# Altium PCB PCB3.PcbDoc
Units mm, origin at the board's own origin, x right, y up, seen from the top; angles counter-clockwise.
Board outline 90 x 47 mm, 2 copper layers (Top Layer, Bottom Layer); 34 components, 53 nets, 140 pads, 265 vias.
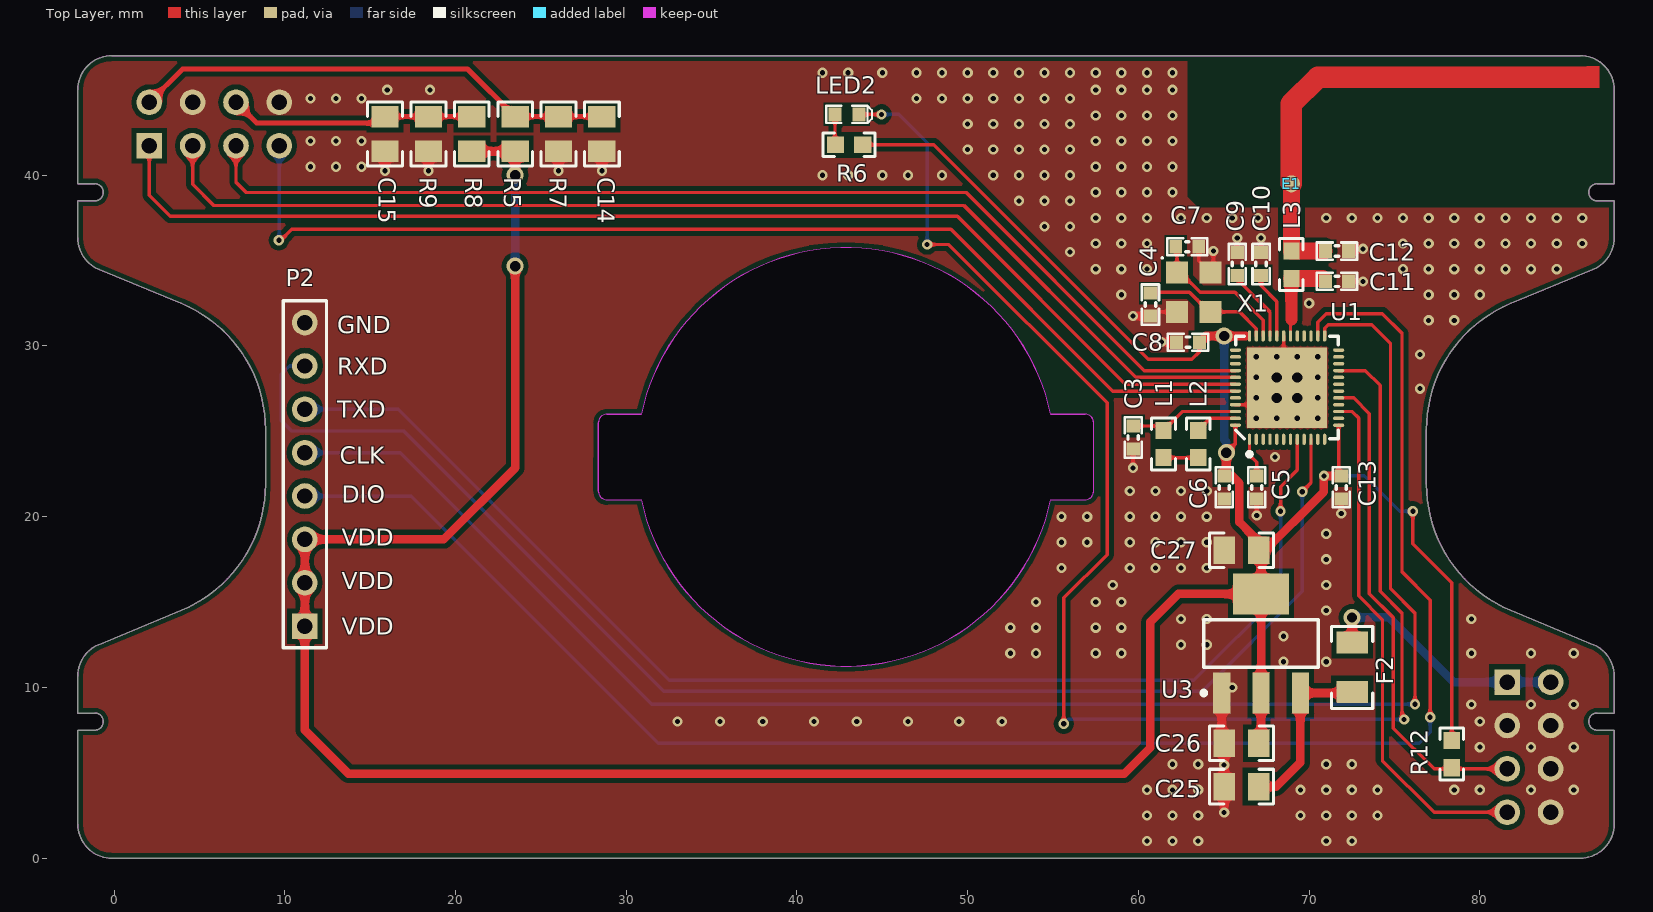
[diagram p0: Top Layer view]
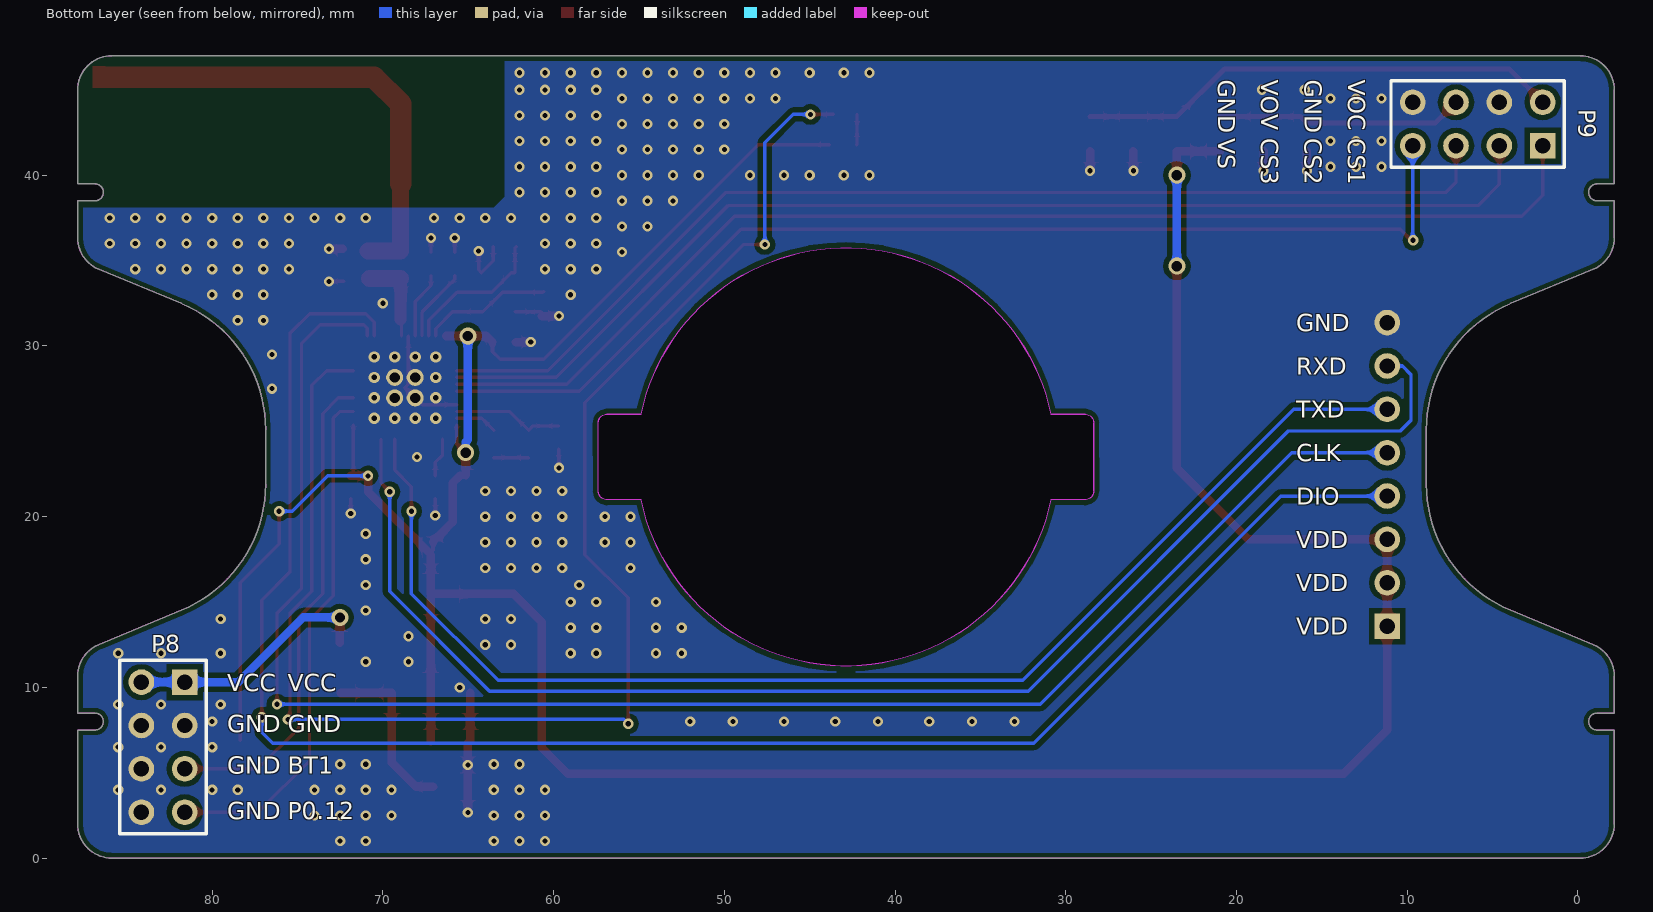
[diagram p1: Bottom Layer view, seen from below]

## Layer stack, top to bottom
Top Solder: solder mask 0.0102, Solder Resist, Dk 3.5
Top Layer: signal copper 0.0356
Dielectric 1: dielectric 0.32, FR-4, Dk 4.8
Bottom Layer: signal copper 0.0356
Bottom Solder: solder mask 0.0102, Solder Resist, Dk 3.5

## Board outline
-2.127,2 -2.127,7.5 -1.127,7.5 ccw(c-1.127,8) -1.127,8.5 -2.127,8.5 -2.127,10.664 cw(c-0.127,10.664) -0.892,12.511 3.934,14.511 ccw(c0.873,21.902) 8.873,21.902 8.873,25.098 ccw(c0.873,25.098) 3.934,32.489 -0.892,34.489 cw(c-0.127,36.336) -2.127,36.336 -2.127,38.5 -1.127,38.5 ccw(c-1.127,39) -1.127,39.5 -2.127,39.5 -2.127,45 cw(c-0.127,45) -0.127,47 85.873,47 cw(c85.873,45) 87.873,45 87.873,39.5 86.873,39.5 ccw(c86.873,39) 86.873,38.5 87.873,38.5 87.873,36.336 cw(c85.873,36.336) 86.638,34.489 81.812,32.489 ccw(c84.873,25.098) 76.873,25.098 76.873,21.902 ccw(c84.873,21.902) 81.812,14.511 86.638,12.511 cw(c85.873,10.664) 87.873,10.664 87.873,8.5 86.873,8.5 ccw(c86.873,8) 86.873,7.5 87.873,7.5 87.873,2 cw(c85.873,2) 85.873,0 -0.127,0 cw(c-0.127,2)
cut-out: 28.366,21.5 ccw(c28.873,21.5) 28.873,20.993 ccw(c28.873,21) 28.873,20.993 30.875,20.993 ccw(c42.873,23.5) 54.871,20.993 56.873,20.993 ccw(c56.873,21.5) 57.38,21.5 57.38,25.5 ccw(c56.873,25.5) 56.873,26.007 54.871,26.007 ccw(c42.873,23.5) 30.875,26.007 28.873,26.007 ccw(c28.873,25.5) 28.366,25.5

## Design rules (kind name [scope] priority, off if disabled: settings)
Clearance [All] p1: gap=0.2
MinimumSolderMaskSliver [All] p1: minsoldermaskwidth=0.1
PolygonConnect [All] p1: connectstyle=Direct reliefconductorwidth=0.254 reliefentries=4 polygonreliefangle="90 Angle" airgapwidth=0.254
RoutingVias [All] p1: holewidth=0.3 width=0.6 viastyle="Through Hole" minholewidth=0.3 minwidth=0.6 maxholewidth=5 maxwidth=5
SilkToSilkClearance [All] p1: silktosilkclearance=0.1
SilkToSolderMaskClearance [IsPad] p1: minsilkscreentomaskgap=0.01 clearancetoexposedcopper=TRUE
SolderMaskExpansion [All] p1: expansion=0.102
Width [All] p1: maxlimit=5 minlimit=0.2 preferedwidth=0.254
27 further rules are at their usual default settings.

## Classes and differential pairs
component class pca10040_sheet3_buttons_and_leds: C14 C15 C19 C20 C25 C26 C27 F2 LED2 P8 P9 R5 R6 R7 R8 R9 R12 SB1 SW5 U3

## Components (designator, comment, footprint, x,y, rotation, side; value= is the part's Value field where it differs from the comment)
C3 "1.0µF" CAPC1608X06L 59.69,24.638 r90 top
C4 "12pF" CAPC1608X06L 60.706,32.425 r270 top
C5 "100nF" CAPC1608X06L 66.929,21.717 r270 top
C6 "4.7µF" CAPC1608X06L 65.024,21.717 r270 top
C7 "12pF" CAPC1608X06L 62.865,35.814 r0 top
C8 "100nF" CAPC1608X06L 62.905,30.226 r180 top
C9 "100pF" CAPC1608X06L 65.786,34.798 r90 top
C10 "N.C." CAPC1608X06L 67.183,34.798 r90 top
C11 "0.8pF" CAPC1608X06L 71.628,33.782 r180 top
C12 "1.2pF" CAPC1608X06L 71.628,35.56 r0 top
C13 "100nF" CAPC1608X06L 71.882,21.717 r270 top
C14 "106" 0805_HV 28.575,42.418 r90 top
C15 "106" 0805_HV 15.875,42.418 r90 top
C25 "105" 0805_HV 66.04,4.191 r0 top
C26 "105" 0805_HV 66.04,6.731 r0 top
C27 "105" 0805_HV 66.04,18.034 r0 top
E1 "Antenna" nrfant 68.961,39.497 r0 top locked
F2 "Res" 1206 72.517,11.176 r270 top
L1 "15nH" 0603 61.468,24.257 r270 top
L2 "10µH" 0603 63.5,24.257 r90 top
L3 "3.9nH" 0603 68.961,34.76 r90 top
LED2 "L0603G" LED_0603_G 42.926,43.561 r180 top
P2 "Header 8" HDR1X8 11.176,13.589 r90 top locked
P8 "Header 4X2" HDR2X4 81.603,10.31 r270 bottom locked
P9 "Header 4X2" HDR2X4 2.063,41.73 r0 bottom locked
R5 "1K" 0805_HV 23.495,42.418 r270 top
R6 "220R" 0603 43.053,41.783 r0 top
R7 "2.2K" 0805_HV 26.035,42.418 r270 top
R8 "1K" 0805_HV 20.955,42.418 r270 top
R9 "2.2K" 0805_HV 18.415,42.418 r270 top
R12 "100k" 0603 78.359,6.096 r90 top
U1 "nRF52832-QFAA" QFN40P600X600X90-48N 68.707,27.559 r90 top locked
U3 "AMS1117-3.3V SOT223 _MH" SOT223 67.183,12.573 r0 top
X1 "CX3225SB32000D0FFFCC" SON230P260X60-4N 63.246,33.147 r0 top

## Footprints (in the part's own frame and the unit in brackets; to place one, negate y for a bottom-side part, rotate by r counter-clockwise, add the part's x,y. Pads: shape width x height; smd on the part's side, far side on the other; paste and mask are expansions set on the pad)
0603 [mm] "0603 from SM-752 data"
  rect 1x0.95 smd: 1(-0.8,0) 2(0.8,0)
  silkscreen extent -1.52,-0.69 1.52,0.69, body extent -0.87,-0.47 0.87,0.47, height 1
0805_HV [mil] "0805 with 30mil clearance between pads"
  rect 50x63 smd: 1(-40,0) 2(40,0)
  silkscreen extent -74,-40 74,40, body extent -43,-29 43,29, height 57
1206 [mm] "1206 from SM-752 data"
  rect 1.3x1.85 smd: 1(1.45,0) 2(-1.45,0)
  silkscreen extent -2.4,-1.21 2.4,1.21, body extent -1.7,-0.9 1.7,0.9, height 1.35
CAPC1608X06L [mm]
  rect 0.75x0.8 smd: 1(-0.675,0) 2(0.675,0)
  silkscreen extent -1.17,-0.5 1.17,0.5, body extent -0.8,-0.43 0.8,0.43, height 0.8
HDR1X8 [mm] "Connector; Header; 8 Position"
  rect 1.5x1.5 hole 0.9: 1(0,0)
  round 1.5 hole 0.9: 2(2.54,0) 3(5.08,0) 4(7.62,0) 5(10.16,0) 6(12.7,0) 7(15.24,0) 8(17.78,0)
  silkscreen extent -1.27,-1.27 19.05,1.27
HDR2X4 [mm] "Connector; Header; 4x2 Position"
  rect 1.5x1.5 hole 0.9: 1(0,0)
  round 1.5 hole 0.9: 2(0,-2.54) 3(2.54,0) 4(2.54,-2.54) 5(5.08,0) 6(5.08,-2.54) 7(7.62,0) 8(7.62,-2.54)
  silkscreen extent -1.27,-3.81 8.89,1.27
LED_0603_G [mil]
  rect 30x32 smd: 1(-27.5,0) 2(27.5,0)
  silkscreen extent -58,-20 48,20, body extent -32,-16 32,16, height 24
nrfant [mm]
  round 1 smd: 1(0,0)
  Top Layer region: 18.048,5.617 18.048,6.887 17.286,6.887 17.286,5.617
  Top Layer lines w1.27: 0,0 0,4.689 ; 17.401,6.248 1.559,6.248 ; 0,4.689 1.559,6.248 ; 0,4.689 0,4.689 ; 1.559,6.248 1.559,6.248
QFN40P600X600X90-48N [mm]
  oval 0.65x0.2 smd: 1(-3.025,2.2) 2(-3.025,1.8) 3(-3.025,1.4) 4(-3.025,1) 5(-3.025,0.6) 6(-3.025,0.2) 7(-3.025,-0.2) 8(-3.025,-0.6) 9(-3.025,-1) 10(-3.025,-1.4) 11(-3.025,-1.8) 12(-3.025,-2.2) 25(3.025,-2.2) 26(3.025,-1.8) 27(3.025,-1.4) 28(3.025,-1) 29(3.025,-0.6) 30(3.025,-0.2) 31(3.025,0.2) 32(3.025,0.6) 33(3.025,1) 34(3.025,1.4) 35(3.025,1.8) 36(3.025,2.2)
  oval 0.2x0.65 smd: 13(-2.2,-3.025) 14(-1.8,-3.025) 15(-1.4,-3.025) 16(-1,-3.025) 17(-0.6,-3.025) 18(-0.2,-3.025) 19(0.2,-3.025) 20(0.6,-3.025) 21(1,-3.025) 22(1.4,-3.025) 23(1.8,-3.025) 24(2.2,-3.025) 37(2.2,3.025) 38(1.8,3.025) 39(1.4,3.025) 40(1,3.025) 41(0.6,3.025) 42(0.2,3.025) 43(-0.2,3.025) 44(-0.6,3.025) 45(-1,3.025) 46(-1.4,3.025) 47(-1.8,3.025) 48(-2.2,3.025)
  rect 4.7x4.7 smd: 49(0,0)
  silkscreen extent -4.02,-3 3,3, body extent -3.02,-3.02 3.02,3.02, height 0.86
SON230P260X60-4N [mm] "SON, 4-Leads, Body 3.25x2.55mm, Pitch 2.30mm, IPC Medium Density"
  rect 1.3x1.3 smd: 1(-0.985,1.15) 2(-0.985,-1.15) 3(0.985,-1.15) 4(0.985,1.15)
  silkscreen extent -1.9,1.96 -1.8,2.06, body extent -1.3,-1.65 1.3,1.65, height 0.6
SOT223 [mm]
  rect 1x2.4 smd: 1(-2.3,-2.9) 2(0,-2.9) 3(2.3,-2.9)
  rect 3.3x2.4 smd: 4(0,2.9)
  silkscreen extent -3.47,-3.02 3.35,1.4, body extent -3.25,-3.56 3.25,3.4, height 1.68

## Part data
C3: library part C0603-1µ0, "Capacitor, X7R, ±10%"
C4 C7: library part C0402-12p, "Capacitor, NP0, ±2%"
C5 C8 C13: library part C0402-100n, "Capacitor, X7R, ±10%"
C6: library part C0603-4µ7, "Capacitor, X5R, ±10%"
C9: library part C0402-100p, "Capacitor, NP0, ±5%"
C10: library part C0402-N.C., "Not mounted"
C11: library part C0402-0.8p, "Capacitor, NP0, ±5%"
C12: library part C0402-1.2p, "Capacitor, NP0, ±0.1pF"
C14 C15 C25 C26 C27: library part CM, "Cap SMD"
E1: "Generic Antenna"
F2: library part Res-SMD, "Resistor"
L1: library part L0402-15n, "Inductor, 320mA, ±5%"
L2: library part L0603-10µ, "Inductor, 80mA, ±10%"
L3: library part L0402-3n9, "Inductor, 170mA, ±0.1nH"
LED2: library part "LG L29K Smartled Green", "LED SMARTLED GREEN 570NM 0603"
P2: "Header, 8-Pin"
P8 P9: "Header, 4-Pin, Dual row"
R5 R7 R8 R9 R12: library part R0402-100k, "Resistor, ±1%, 0.063W"
R6: library part R0402-220, "Resistor, ±1%, 0.063W"
U1: "Multi-protocol Bluetooth Low Energy and 2.4GHz proprietary system-on-chip"
X1: library part XTAL_SMD2016_32MHz_8pF_Epson, "XTAL SMD 2016, 32MHz, Cl=8pF, Tol: ±10ppm, Stab: ±10ppm"

## Free pads (board coordinates)
  round 1 hole 0.6 paste+0 mask+0: 4(68.107,28.159) 5(69.307,28.159) 6(68.107,26.959) 7(69.307,26.959)

## Via types
v1: diameter 0.6, hole 0.3, Top Layer to Bottom Layer, tented both sides, 244 vias
v2: diameter 0.66, hole 0.33, Top Layer to Bottom Layer, tented both sides, 16 vias
v3: diameter 1, hole 0.6, Top Layer to Bottom Layer, tented both sides, 5 vias

## Nets (pads, with @x,y where several pads share a name; then routed paths per layer and width w, separated by ;. In a path a pad name is that pad's centre, name@x,y a point inside that pad or via, vN(x,y) a via of type N, cw(c..) or ccw(c..) an arc to the next point about the centre after c; other vN are vias at no path point)
ANT: C12.1 E1.1 L3.2 | length 6.1
  Top Layer w0.2: E1.1@68.834,39.497 E1.1@68.961,39.37 ; C12.1@70.866,35.56 C12.1@70.993,35.687
  Top Layer w1: E1.1@68.961,39.37 L3.2 C12.1@70.866,35.56
BUTTON1: P8.5 R12.1 U1.17 | length 28.8
  Top Layer w0.2: U1.17 72.609,26.959 73.533,26.035 73.533,15.494 74.93,14.097 74.93,7.62 77.32,5.23 P8.5
CTS: 
CURRENT_SIGNAL1: P9.1 U1.42 | length 71.1
  Top Layer w0.2: P9.1 2.063,38.831 3.302,37.592 49.403,37.592 59.236,27.759 U1.42
CURRENT_SIGNAL2: P9.3 U1.41 | length 68
  Top Layer w0.2: P9.3 4.603,39.466 5.842,38.227 49.784,38.227 59.852,28.159 U1.41
CURRENT_SIGNAL3: P9.5 U1.40 | length 65.2
  Top Layer w0.2: P9.5 7.143,39.593 7.747,38.989 49.911,38.989 60.341,28.559 U1.40
DEC1: C5.1 U1.1 | length 2.3
  Top Layer w0.2: U1.1 66.507,23.611 66.929,23.189 C5.1
DEC2: C10.1 U1.32 | length 3.9
  Top Layer w0.2: C10.1 67.183,33.528 68.107,32.604 U1.32
DEC3: C9.1 U1.33 | length 4.3
  Top Layer w0.2: C9.1 65.786,33.909 67.707,31.988 U1.33
DEC4: C3.2 L1.1 U1.46 | length 6.6
  Top Layer w0.2: C3.2 61.212,25.313 L1.1 62.57,26.159 U1.46
GND: C3.1 C4.2 C5.2 C6.2 C7.2 C8.2 C9.2 C10.2 C11.1 C12.2 C13.2 C14.1 C15.1 C25.1 C26.1 C27.1 P2.8 P8.3 P8.4 P8.6 P8.8 P9.4 P9.8 pad.4 pad.5 pad.6 pad.7 R7.2 R9.2 U1.31 U1.45 U1.49 U3.1 X1.2 X1.4 | length 31.5
  Top Layer w0.2: v1(59.69,22.86) C3.1 ; C4.2@60.579,31.837 60.739,31.997 X1.2 ; C7.2 63.54,34.988 X1.4 64.389,34.455 v1(64.389,35.56) ; C26.1@64.883,6.872 C26.1 ; U3.1 U3.1@65.024,9.532 ; U1.45 67.707,26.559 v2(68.107,26.959) U1.49 68.507,27.759 U1.31 ; C9.2 v1(65.786,36.322) ; v1(66.929,20.066) C5.2 ; C10.2 v1(67.183,36.322) ; v1(71.882,20.193) C13.2 ; C11.1 v1(73.152,33.782)
  Top Layer w0.5: v1(15.875,40.259) C15.1 ; v1(18.415,40.259) R9.2 ; v1(26.035,40.259) R7.2 ; v1(28.575,40.259) C14.1 ; v1(59.69,31.75) C4.2 ; v1(61.341,30.226) C8.2 ; C26.1@64.883,6.872 U3.1 ; v1(65.024,2.667) C25.1 v1(65.024,5.461) C26.1 ; C12.2@72.343,35.687 v1(73.152,35.687)
  other v1: 60.5,1 62,1 63.5,1 71,1 72.5,1 60.5,2.5 62,2.5 63.5,2.5 69.5,2.5 71,2.5 72.5,2.5 74,2.5 60.5,4 62,4 63.5,4 69.5,4 71,4 72.5,4 74,4 78.5,4 80,4 83,4 85.5,4 62,5.5 63.5,5.5 71,5.5 72.5,5.5 80,6.5 83,6.5 85.5,6.5 33,8 35.5,8 38,8 41,8 43.5,8 46.5,8 49.5,8 52,8 80,8 79.5,9 83,9 85.5,9 65.5,10 68.5,11.5 71,11.5 52.5,12 54,12 57.5,12 59,12 79.5,12 83,12 85.5,12 62.5,12.5 64,12.5 68.5,13 52.5,13.5 54,13.5 57.5,13.5 59,13.5 62.5,14 64,14 79.5,14 71,14.5 54,15 57.5,15 59,15 58.5,16 71,16 55.5,17 59.5,17 61,17 62.5,17 64,17 71,17.5 55.5,18.5 57,18.5 59.5,18.5 61,18.5 62.5,18.5 64,18.5 71,19 55.5,20 57,20 59.5,20 61,20 62.5,20 64,20 59.5,21.5 61,21.5 62.5,21.5 64,21.5 68,23.5 76.5,27.5 76.5,29.5 77,31.5 78.5,31.5 70,32.5 59,33 77,33 78.5,33 80,33 57.5,34.5 59,34.5 60.5,34.5 75.5,34.5 77,34.5 78.5,34.5 80,34.5 81.5,34.5 83,34.5 84.5,34.5 56,35.5 57.5,36 59,36 60.5,36 75.5,36 77,36 78.5,36 80,36 81.5,36 83,36 84.5,36 86,36 54.5,37 56,37 57.5,37.5 59,37.5 60.5,37.5 62.5,37.5 64,37.5 65.5,37.5 67,37.5 71,37.5 72.5,37.5 74,37.5 75.5,37.5 77,37.5 78.5,37.5 80,37.5 81.5,37.5 83,37.5 84.5,37.5 86,37.5 53,38.5 54.5,38.5 56,38.5 57.5,39 59,39 60.5,39 62,39 41.5,40 43,40 45,40 46.5,40 48.5,40 51.5,40 53,40 54.5,40 56,40 11.5,40.5 13,40.5 14.5,40.5 57.5,40.5 59,40.5 60.5,40.5 62,40.5 50,41.5 51.5,41.5 53,41.5 54.5,41.5 56,41.5 11.5,42 13,42 14.5,42 57.5,42 59,42 60.5,42 62,42 50,43 51.5,43 53,43 54.5,43 56,43 57.5,43.5 59,43.5 60.5,43.5 62,43.5 11.5,44.5 13,44.5 14.5,44.5 47,44.5 48.5,44.5 50,44.5 51.5,44.5 53,44.5 54.5,44.5 56,44.5 16,45 18.5,45 57.5,45 59,45 60.5,45 62,45 41.5,46 43,46 45,46 47,46 48.5,46 50,46 51.5,46 53,46 54.5,46 56,46 57.5,46 59,46 60.5,46 62,46
  other v2: 66.907,25.759 68.107,25.759 69.307,25.759 70.507,25.759 66.907,26.959 69.307,26.959 70.507,26.959 66.907,28.159 68.107,28.159 69.307,28.159 70.507,28.159 66.907,29.359 68.107,29.359 69.307,29.359 70.507,29.359
LED2: LED2.1 U1.21 | length 87.6
  Top Layer w0.2: LED2.1 v1(44.958,43.561) ; v1(47.625,35.941) 48.895,35.941 58.166,26.67 58.166,17.78 55.626,15.24 v1(55.626,7.874) ; U1.21 73.295,28.559 74.168,27.686 74.168,15.621 75.438,14.351 v1@75.438,8.382
  Bottom Layer w0.2: v1(44.958,43.561) 45.974,43.561 47.625,41.91 v1(47.625,35.941) ; v1(55.626,7.874) 55.88,8.128 v1(75.565,8.128)
NetC11_2: C11.2 L3.1 U1.30 | length 5.4
  Top Layer w0.2: U1.30 68.907,31.496 ; C11.2@70.775,33.96 C11.2
  Top Layer w0.7: 68.961,31.55 L3.1
  Top Layer w1: L3.1 C11.2@70.775,33.96
NetC25_2: C25.2 F2.1 U3.3 | length 10.1
  Top Layer w0.2: F2.1@72.464,9.673 F2.1
  Top Layer w0.5: C25.2 68.072,4.191 69.483,5.602 U3.3 F2.1@72.464,9.673
NetL1_2: L1.2 L2.1 | length 2
  Top Layer w0.2: L1.2 L2.1
NetL2_2: L2.2 U1.47 | length 2.5
  Top Layer w0.2: L2.2 64.202,25.759 U1.47
NetLED2_2: LED2.2 R6.1 | length 1.8
  Top Layer w0.2: LED2.2 42.227,41.808 R6.1
P0.00: U1.2
P0.01: U1.3
P0.02: U1.4
P0.03: U1.5
P0.04: U1.6
P0.05: U1.7
P0.06: P2.6 U1.8 | length 75.3
  Top Layer w0.2: v1(68.326,20.32) 68.326,21.752 69.307,22.733 U1.8
  Bottom Layer w0.2: P2.6 16.637,26.289 32.512,10.414 63.246,10.414 68.326,15.494 v1(68.326,20.32)
P0.07: U1.9
P0.08: P2.7 U1.10 | length 82.2
  Top Layer w0.2: v1(69.596,21.463) 70.107,21.974 U1.10
  Bottom Layer w0.2: P2.7 10.287,28.829 9.779,28.321 9.779,25.654 10.414,25.019 16.96,25.019 32.2,9.779 63.754,9.779 69.596,15.621 v1(69.596,21.463)
P0.09/NFC1: U1.11
P0.10/NFC2: U1.12
P0.11: U1.14
P0.12: P8.7 U1.15 | length 30.5
  Top Layer w0.2: U1.15 72.52,26.159 72.898,25.781 72.898,15.367 74.295,13.97 74.295,5.715 77.32,2.69 P8.7
P0.13: U1.16
P0.15: U1.18
P0.16: U1.19
P0.17: U1.20
P0.19: U1.22
P0.20: U1.23
P0.21: U1.24
P0.22: U1.27
P0.23: U1.28
P0.24: U1.29
P0.25: U1.37
P0.26: U1.38
P0.27: U1.39
P0.31: P9.7 U1.43 | length 65.8
  Top Layer w0.2: v1(9.652,36.195) 9.779,36.195 10.414,36.83 49.022,36.83 58.493,27.359 U1.43
  Bottom Layer w0.2: v1(9.652,36.195) 9.683,36.226 P9.7
RTS: 
SWDCLK: P2.5 U1.25 | length 97.9
  Top Layer w0.2: U1.25 70.907,31.029 71.12,31.242 73.66,31.242 74.768,30.134 74.768,15.783 76.2,14.351 v1(76.2,9.017) v1@76.073,8.89
  Bottom Layer w0.2: P2.5 16.764,23.749 31.496,9.017 v1(76.2,9.017)
SWDIO: P2.4 U1.26 | length 102.6
  Top Layer w0.2: U1.26 70.507,31.391 70.993,31.877 74.295,31.877 75.438,30.734 75.438,16.764 77.089,15.113 v1(77.089,8.255)
  Bottom Layer w0.2: P2.4 17.399,21.209 31.877,6.731 76.454,6.731 77.089,7.366 v1(77.089,8.255)
VCC_RELAY: F2.2 P8.1 P8.2 | length 14.7
  Top Layer w0.5: F2.2 v3(72.517,14.097)
  Bottom Layer w0.5: v3(72.517,14.097) 74.676,14.097 78.463,10.31 P8.1 P8.2
VDD_NRF: C6.1 C8.1 C13.1 C26.2 C27.2 P2.1 P2.2 P2.3 R5.2 R6.2 R8.2 R12.2 U1.13 U1.36 U1.48 U3.2 U3.4 | length 197.9
  Top Layer w0.2: R6.2 48.006,41.783 60.579,29.21 63.119,29.21 63.58,29.671 C8.1 ; C6.1 65.492,22.392 ; v3(65.151,23.749) 65.682,24.28 U1.48 ; C26.2 C26.2@67.183,6.858 ; C27.2 C27.2@67.056,18.542 ; U3.4@67.183,15.219 67.056,15.346 U3.4 ; U1.13 71.732,22.542 C13.1 ; v1(76.073,20.32) 76.073,18.415 78.359,16.129 R12.2
  Top Layer w0.5: R8.2 R5.2 v3(23.495,40.005) ; v3(23.495,34.671) 23.495,22.86 19.304,18.669 P2.3 P2.2 P2.1 11.176,7.493 13.716,4.953 59.182,4.953 60.706,6.477 60.706,13.843 62.336,15.473 U3.4 67.183,17.78 70.866,21.463 v1(70.866,22.392) ; C8.1 63.938,30.584 v3(65.024,30.584) 66.294,30.584 ; C6.1@65.151,22.432 v3(65.151,23.749) ; 65.492,22.392 65.913,21.971 65.913,19.685 C27.2@67.056,18.542 ; C26.2@67.183,6.858 U3.2 U3.4@67.183,15.219 ; v1@70.866,22.397 v1(70.866,22.392) ; C13.1 v1(70.866,22.392)
  Bottom Layer w0.2: v1(70.866,22.392) 73.239,22.392 75.311,20.32 v1(76.073,20.32)
  Bottom Layer w0.5: v3(23.495,34.671) v3(23.495,40.005) ; v3(65.024,30.584) 65.024,24.511 65.151,24.384 v3(65.151,23.749)
VOFFSET_CURRENT: C14.2 P9.2 R5.1 R7.1 | length 28.5
  Top Layer w0.3: P9.2 4.021,46.228 20.701,46.228 R5.1 C14.2
VOFFSET_VOL: C15.2 P9.6 R8.1 R9.1 | length 14.5
  Top Layer w0.3: P9.6 8.36,43.053 15.875,43.053 16.256,43.434 R9.1 R8.1
XC1: C7.1 U1.34 X1.1 | length 8.7
  Top Layer w0.2: C7.1 62.261,35.743 X1.1 62.477,34.297 63.627,33.147 65.659,33.147 67.307,31.499 U1.34
XC2: C4.1 U1.35 X1.3 | length 7.7
  Top Layer w0.2: C4.1@60.579,33.187 60.619,33.147 62.992,33.147 64.142,31.997 X1.3 65.92,31.997 66.907,31.01 U1.35
pads on no net: U1.44

## Polygon pours and split planes (outlines as drawn)
GND on Top Layer "Bottom Layer-No Net" (solid, remove dead copper, pour order 4): 271 vertices, not listed, extent -2.127,0.01 87.873,47
GND on Bottom Layer "Bottom Layer-No Net" (solid, remove dead copper, pour order 3): 271 vertices, not listed, extent -2.127,0.01 87.873,47

## Keep-outs
Keep-Out Layer:
  lines w0.013: 57.373,21.5 cw(c56.873,21.5) 56.873,21 54.865,21 cw(c42.873,23.5) 30.881,21 28.873,21 cw(c28.873,21.5) 28.373,21.5 28.373,25.5 cw(c28.873,25.5) 28.873,26 30.881,26 cw(c42.873,23.5) 54.865,26 56.873,26 cw(c56.873,25.5) 57.373,25.5 ; 57.373,21.5 57.373,25.5 ; 57.373,21.5 57.373,25.5 ; -2.127,2 ccw(c-0.127,2) -0.127,0 85.873,0 ccw(c85.873,2) 87.873,2 87.873,7.5 86.873,7.5 cw(c86.873,8) 86.873,8.5 87.873,8.5 87.873,10.664 ccw(c85.873,10.664) 86.638,12.511 81.812,14.511 cw(c84.873,21.902) 76.873,21.902 76.873,25.098 cw(c84.873,25.098) 81.812,32.489 86.638,34.489 ccw(c85.873,36.336) 87.873,36.336 87.873,38.5 86.873,38.5 cw(c86.873,39) 86.873,39.5 87.873,39.5 87.873,45 ccw(c85.873,45) 85.873,47 -0.127,47 ccw(c-0.127,45) -2.127,45 -2.127,39.5 -1.127,39.5 cw(c-1.127,39) -1.127,38.5 -2.127,38.5 -2.127,36.336 ccw(c-0.127,36.336) -0.892,34.489 3.934,32.489 cw(c0.873,25.098) 8.873,25.098 8.873,21.902 cw(c0.873,21.902) 3.934,14.511 -0.892,12.511 ccw(c-0.127,10.664) -2.127,10.664 -2.127,8.5 -1.127,8.5 cw(c-1.127,8) -1.127,7.5 -2.127,7.5 -2.127,2

## Silkscreen, mask and mechanical layers (free items; w line width, h text height)
Top Overlay:
  text "GND" at 13.081,30.734 h1
  text "RXD" at 13.081,28.321 h1
  text "TXD" at 13.081,25.781 h1
  text "CLK" at 13.208,23.114 h1
  text "DIO" at 13.335,20.828 h1
  text "VDD" at 13.335,18.288 h1
  text "VDD" at 13.335,15.748 h1
  text "VDD" at 13.335,13.081 h1
Bottom Overlay:
  text "VOC" at 13.462,45.593 h1 r90
  text "GND" at 16.002,45.593 h1 r90
  text "VOV" at 18.542,45.593 h1 r90
  text "GND" at 21.082,45.593 h1 r90
  text "CS1" at 13.462,42.164 h1 r90
  text "CS2" at 16.002,42.164 h1 r90
  text "CS3" at 18.542,42.164 h1 r90
  text "VS" at 21.082,42.164 h1 r90
  text "GND" at 16.51,30.861 h1
  text "RXD" at 16.51,28.321 h1
  text "TXD" at 16.51,25.781 h1
  text "CLK" at 16.51,23.241 h1
  text "DIO" at 16.51,20.701 h1
  text "VDD" at 16.51,18.161 h1
  text "VDD" at 16.51,15.621 h1
  text "VDD" at 16.51,13.081 h1
  text "VCC" at 75.565,9.779 h1
  text "VCC" at 79.121,9.779 h1
  text "GND" at 75.565,7.366 h1
  text "GND" at 79.121,7.366 h1
  text "BT1" at 75.565,4.953 h1
  text "GND" at 79.121,4.953 h1
  text "P0.12" at 75.565,2.286 h1
  text "GND" at 79.121,2.286 h1
Mechanical 1:
  circle w0.013: c81.603,7.77 r0.45
  circle w0.013: c81.603,5.23 r0.45
  circle w0.013: c81.603,2.69 r0.45
  circle w0.013: c84.143,2.69 r0.45
  circle w0.013: c84.143,10.31 r0.45
  circle w0.013: c84.143,7.77 r0.45
  circle w0.013: c84.143,5.23 r0.45
  circle w0.013: c81.603,10.31 r0.45
  circle w0.013: c7.143,44.27 r0.45
  circle w0.013: c4.603,44.27 r0.45
  circle w0.013: c2.063,44.27 r0.45
  circle w0.013: c2.063,41.73 r0.45
  circle w0.013: c9.683,41.73 r0.45
  circle w0.013: c7.143,41.73 r0.45
  circle w0.013: c4.603,41.73 r0.45
  circle w0.013: c9.683,44.27 r0.45
  lines w0.013: 28.373,21.5 27.373,21.5 27.373,25.5 28.373,25.5 ; 41.873,43.5 43.873,43.5 ; 57.373,21.5 58.373,21.5 58.373,25.5 57.373,25.5 ; -1.127,7.477 -1.127,8.523 -0.054,8.523 -0.054,7.477 -1.127,7.477 ; -1.127,38.477 -1.127,39.523 -0.054,39.523 -0.054,38.477 -1.127,38.477 ; 0.793,40.46 10.953,40.46 10.953,45.54 0.793,45.54 0.793,40.46 ; 41.873,42.875 41.873,44.125 43.873,44.125 43.873,42.875 41.873,42.875 ; 80.333,1.42 85.413,1.42 85.413,11.58 80.333,11.58 80.333,1.42 ; 85.8,7.477 86.873,7.477 86.873,8.523 85.8,8.523 85.8,7.477 ; 85.8,38.477 85.8,39.523 86.873,39.523 86.873,38.477 85.8,38.477